# Altium PCB USB_ISO_FS_00.PcbDoc
Units mm, origin at the board's own origin, x right, y up, seen from the top; angles counter-clockwise.
Board outline 44 x 44 mm, 2 copper layers (Top Layer, Bottom Layer), stack 1.571 mm thick; 27 components, 22 nets, 93 pads, 16 vias.
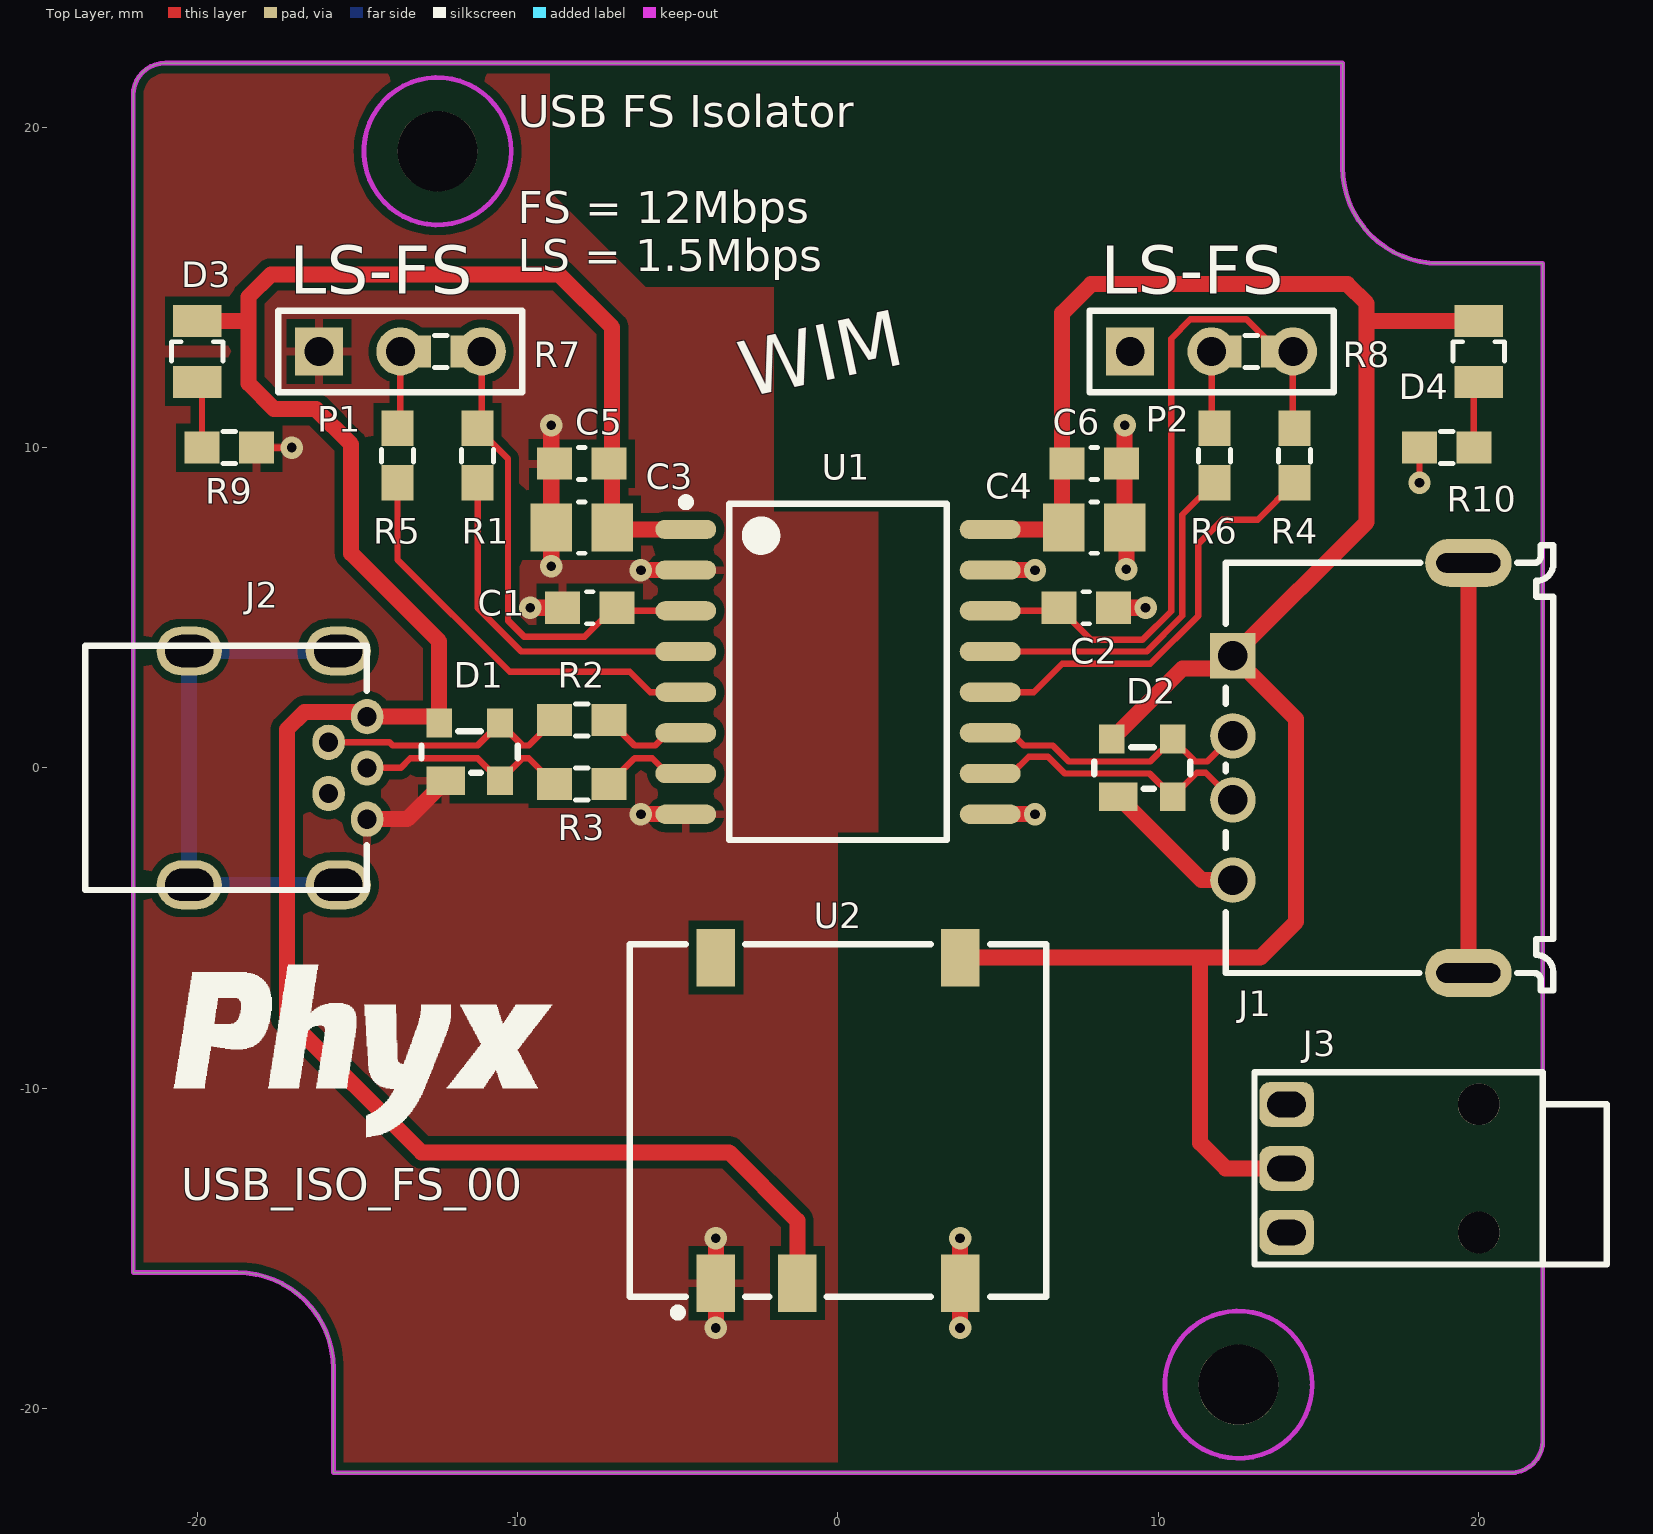
[diagram p0: Top Layer view]
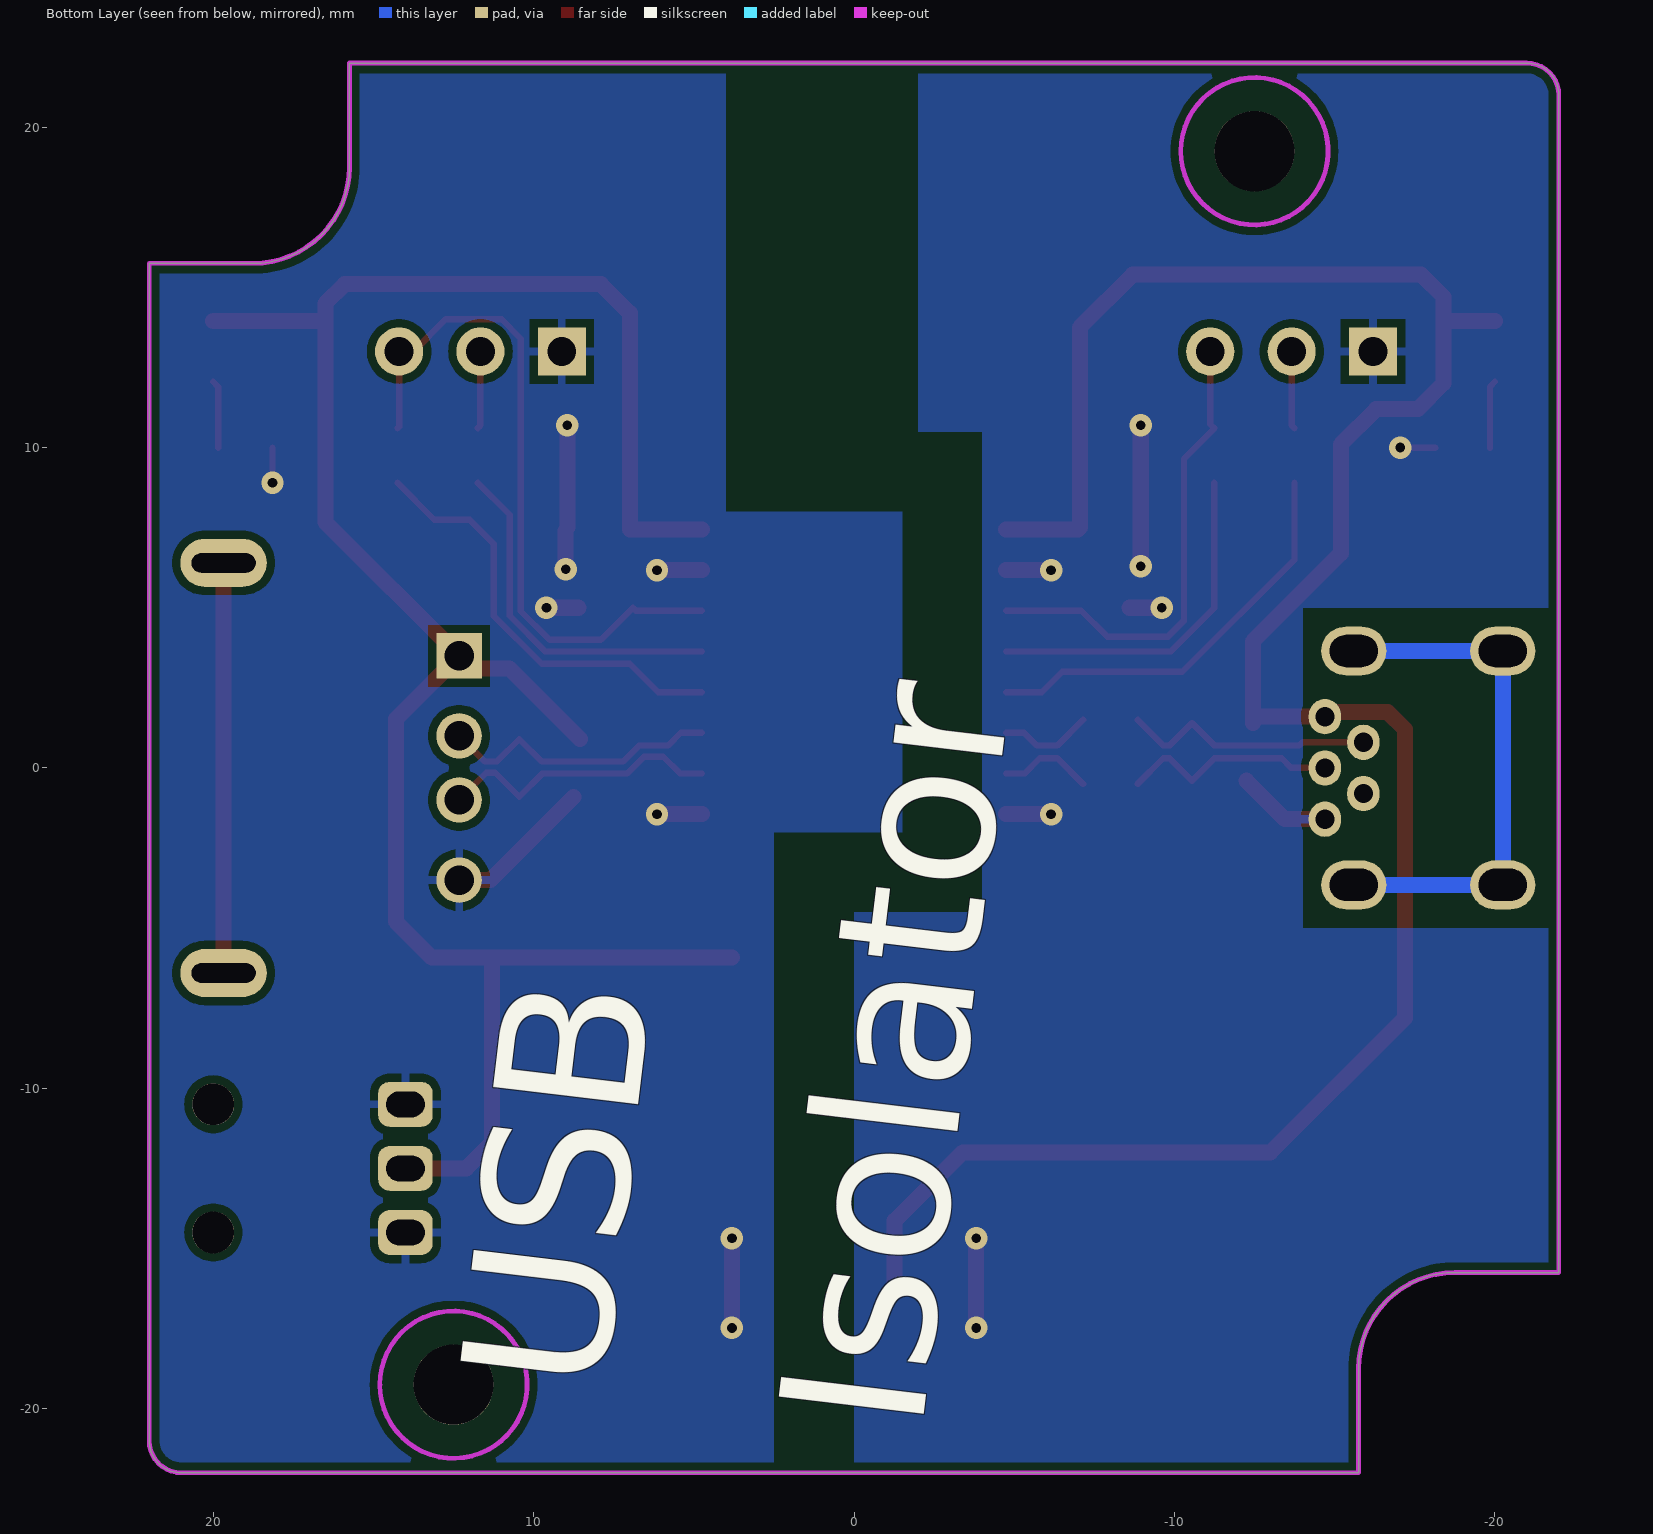
[diagram p1: Bottom Layer view, seen from below]
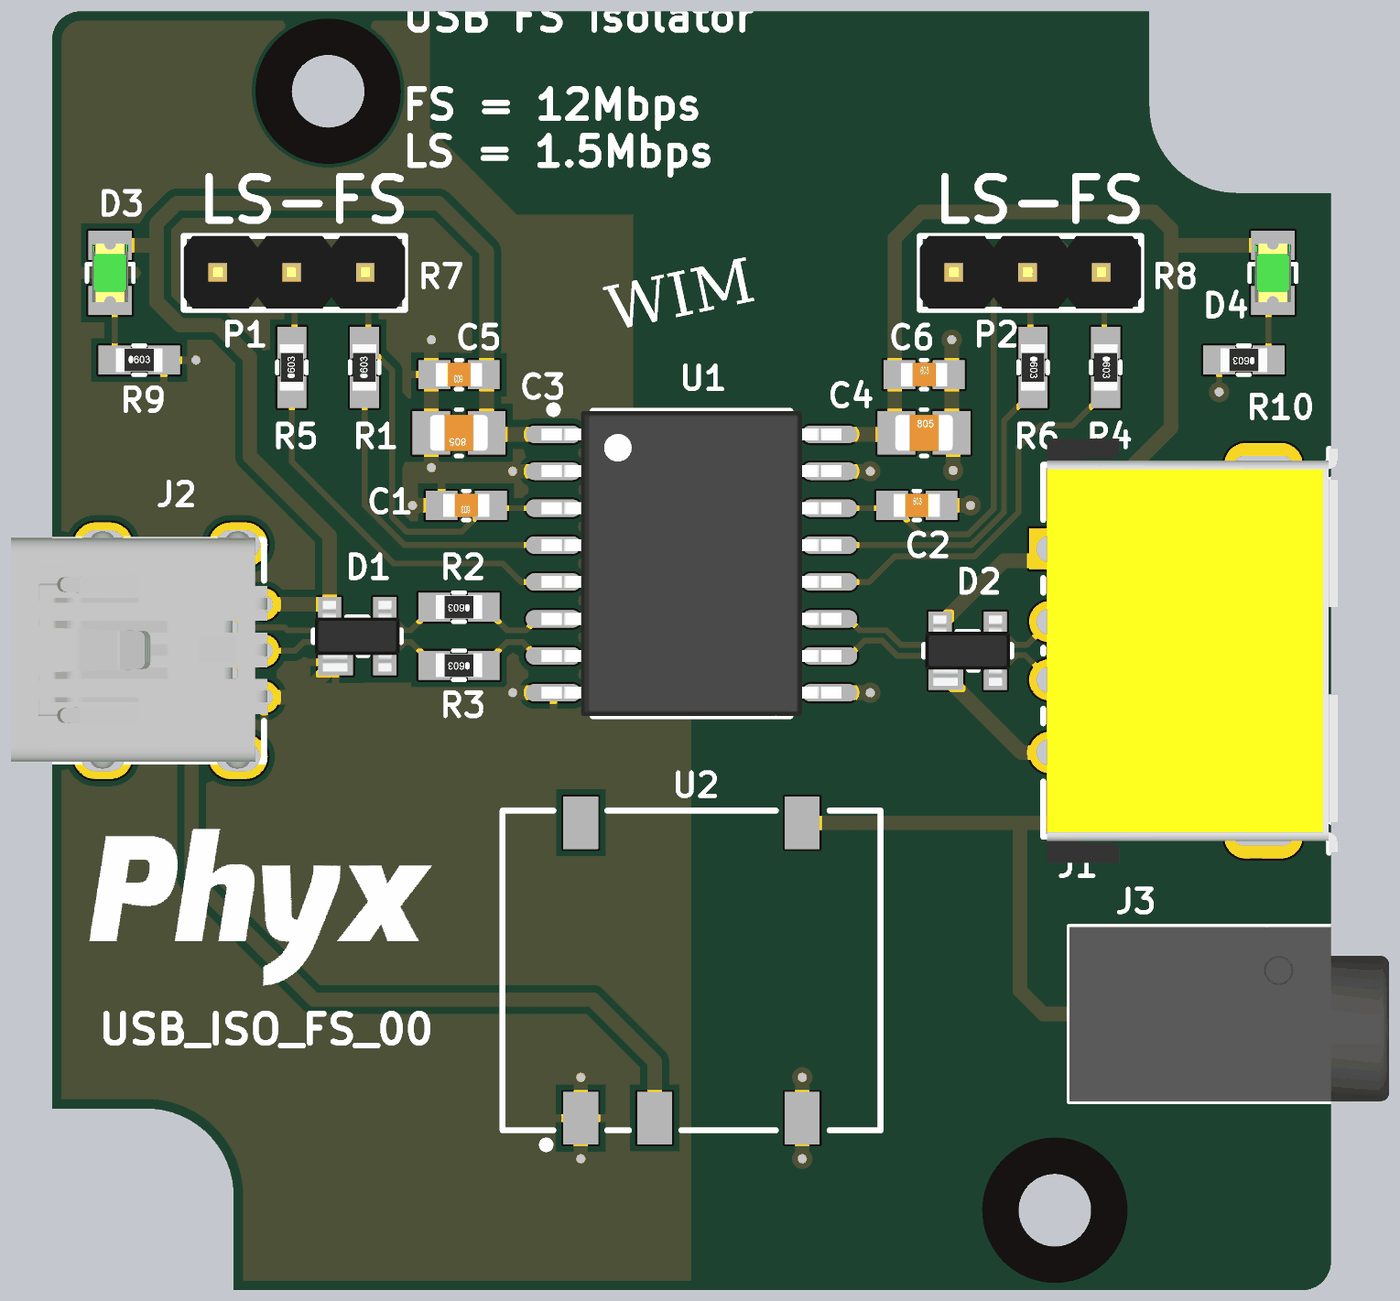
[diagram p2: 3D render of the assembled board from above, using the file's embedded part models]

## Layer stack, top to bottom
Top Solder: solder mask 0.0102, Solder Resist, Dk 3.5
Top Layer: signal copper 0.0356
Dielectric1: dielectric 1.5, FR-4, Dk 4.8
Bottom Layer: signal copper 0.0356
Bottom Solder: solder mask 0.0102, Solder Resist, Dk 3.5

## Board outline
-22,-15.75 -18.75,-15.75 cw(c-18.75,-18.75) -15.75,-18.75 -15.75,-22 21,-22 ccw(c21,-21) 22,-21 22,15.75 18.75,15.75 cw(c18.75,18.75) 15.75,18.75 15.75,22 -21,22 ccw(c-21,21) -22,21

## Design rules (kind name [scope] priority, off if disabled: settings)
Clearance [All] p1: gap=0.15 except(0.25: Arc-Poly Track-Poly SMDPad-Poly THPad-Poly Via-Poly Fill-Poly Poly-Poly)
HoleSize [All] p1: absolutevalues=TRUE maxlimit=4 minlimit=0.025 maxpercent=80.000 minpercent=20.000
MinimumSolderMaskSliver [All] p1: minsoldermaskwidth=0.1
PolygonConnect PolygonConnect_Via [IsVia] p1: connectstyle=Direct reliefconductorwidth=0.254 reliefentries=4 polygonreliefangle="90 Angle" airgapwidth=0.254
PolygonConnect [All] p2: connectstyle=Relief reliefconductorwidth=0.254 reliefentries=4 polygonreliefangle="90 Angle" airgapwidth=0.254
RoutingVias [All] p1: holewidth=0.3 width=0.7 viastyle="Through Hole" minholewidth=0.3 minwidth=0.7 maxholewidth=0.3 maxwidth=0.7
SilkToSolderMaskClearance SilkscreenOverComponentPads [IsPad] p1: minsilkscreentomaskgap=0.254 clearancetoexposedcopper=TRUE
SolderMaskExpansion [All] p1: expansion=0.075
Width [All] p1: maxlimit=2 minlimit=0.2 preferedwidth=0.5 minimp=50.000000 maximp=50.000000 favimp=50.000000
27 further rules are at their usual default settings.

## Classes and differential pairs
net class POWER: GND GND_ISO VDD1 VDD2 VUSB VUSB_ISO
net class 90r: USB.D_N USB.D_P

## Components (designator, comment, footprint, x,y, rotation, side; value= is the part's Value field where it differs from the comment)
C1 "CAP_CERAMIC" C0603_N -7.75,5 r180 top
C2 "CAP_CERAMIC" C0603_N 7.75,5 r0 top
C3 "CAP_CERAMIC" C0805_N -8,7.5 r180 top
C4 "CAP_CERAMIC" C0805_N 8,7.5 r0 top
C5 "CAP_CERAMIC" C0603_N -8,9.5 r180 top
C6 "CAP_CERAMIC" C0603_N 8,9.5 r0 top
D1 "Low Capacitanse TVS Diode array" SOT-143 -11.5,0.5 r0 top
D2 "Low Capacitanse TVS Diode array" SOT-143 9.5,0 r0 top
D3 "Default 0805 Green LED" LED_0805_GR -20,13 r270 top
D4 "Default 0805 Green LED" LED_0805_GR 20,13 r270 top
J1 "USB type A Short horizontal connector" WE_614104150121 16,0 r90 top
J2 "THT USB Mini-B Receptacle" USB_Mini-B_THT -17.5,0 r90 top
J3 "Socket RA 3.5 with 1.35 barrel" DC-003 14,-12.5 r180 top
P1 "Header 3" HDR1X3 -16.2,13 r0 top
P2 "Header 3" HDR1X3 9.12,13 r0 top
R1 "RESISTOR" R0603_N -11.25,9.75 r90 top
R2 "RESISTOR" R0603_N -8,1.5 r180 top
R3 "RESISTOR" R0603_N -8,-0.5 r180 top
R4 "RESISTOR" R0603_N 14.25,9.75 r270 top
R5 "RESISTOR" R0603_N -13.75,9.75 r90 top
R6 "RESISTOR" R0603_N 11.75,9.75 r270 top
R7 "RESISTOR" R0603_N -12.4,13 r180 top
R8 "RESISTOR" R0603_N 12.9,13 r180 top
R9 "RESISTOR" R0603_N -19,10 r0 top
R10 "RESISTOR" R0603_N 19,10 r180 top
U1 "USB FS 12Mbps isolator 2,5kV" SOIC_W_16 0,3 r0 top
U2 "Isolated DC-DC module 1kV 5V 1W" R1SE-0505-R 0,-11 r90 top

## Footprints (in the part's own frame and the unit in brackets; to place one, negate y for a bottom-side part, rotate by r counter-clockwise, add the part's x,y. Pads: shape width x height; smd on the part's side, far side on the other; paste and mask are expansions set on the pad)
C0603_N [mm] "Low density"
  rect 1.1x1 smd: 1(-0.85,0) 2(0.85,0)
  silkscreen extent -0.1,-0.5 0.1,0.5, body extent -0.8,-0.4 0.8,0.4, height 0.3
C0805_N [mm] "Low density"
  rect 1.3x1.5 smd: 1(-0.95,0) 2(0.95,0)
  silkscreen extent -0.1,-0.8 0.1,0.8, body extent -1,-0.62 1,0.63, height 0.78
DC-003 [mm] "CUI PJ-040CH"
  rrect50% 1.7x1.4 hole 0.8 slot 1.2 at 0 deg paste-5: 1(0,0) 2(0,-2) 3(0,2)
  round 1.3 hole 1.3 unplated paste-5: MH1(-6,-2) MH2(-6,2)
  silkscreen extent -10,-3 1,3, body extent -10,-3 1,3, height 5
HDR1X3 [mm] "Connector; Header; 3 Position"
  rect 1.5x1.5 hole 0.9: 1(0,0)
  round 1.5 hole 0.9: 2(2.54,0) 3(5.08,0)
  silkscreen extent -1.27,-1.27 6.35,1.27, body extent -1.27,-1.23 6.35,1.27, height 8.2
LED_0805_GR [mm] "0805 LED GREEN"
  rect 1x1.5 smd: 1(-0.95,0) 2(0.95,0)
  silkscreen extent -0.3,-0.8 0.3,0.8, body extent -1.01,-0.62 1.01,0.63, height 1.1
R1SE-0505-R [mm] "R1SE-0505-R"
  rect 1.8x1.2 smd: 1(-5.08,3.81) 2(-5.08,1.27) 4(-5.08,-3.81) 5(5.08,-3.81) 8(5.08,3.81)
  silkscreen extent -6.12,-6.5 5.5,6.5, body extent -5.35,-6.37 5.35,6.38, height 7
R0603_N [mm] "Low density"
  rect 1.1x1 smd: 1(-0.85,0) 2(0.85,0)
  silkscreen extent -0.2,-0.5 0.2,0.5, body extent -0.8,-0.41 0.8,0.41, height 0.45
SOIC_W_16 [mm] "SOIC, 16-Leads, Body 10,30x7,50mm, Pitch 1,27mm, IPC Medium Density"
  oval 1.9x0.6 smd: 1(-4.75,4.445) 2(-4.75,3.175) 3(-4.75,1.905) 4(-4.75,0.635) 5(-4.75,-0.635) 6(-4.75,-1.905) 7(-4.75,-3.175) 8(-4.75,-4.445) 9(4.75,-4.445) 10(4.75,-3.175) 11(4.75,-1.905) 12(4.75,-0.635) 13(4.75,0.635) 14(4.75,1.905) 15(4.75,3.175) 16(4.75,4.445)
  silkscreen extent -4.87,-5.25 3.4,5.42, body extent -5.16,-5.25 5.16,5.25, height 2.65
SOT-143 [mm] "SOT-143"
  rect 1.2x0.9 smd: 1(-0.75,-0.9)
  rect 0.8x0.9 smd: 2(0.95,-0.9) 3(0.95,0.9) 4(-0.95,0.9)
  silkscreen extent -1.5,-0.65 1.5,0.65, body extent -1.46,-1.21 1.46,1.21, height 1
USB_Mini-B_THT [mm] "USB MiniB THT"
  oval 1.1x1.016 hole 0.6: 1(1.6,-2.8) 2(0.8,-1.6) 3(0,-2.8) 4(-0.8,-1.6) 5(-1.6,-2.8)
  oval 1.524x2.032 hole 1 slot 1.5 at 90 deg: MH1(-3.65,2.75) MH2(3.65,2.75) MH3(-3.65,-1.9) MH4(3.65,-1.9)
  silkscreen extent -3.81,-2.79 3.81,6, body extent -4.05,-2.91 4.1,5.91, height 3.95
WE_614104150121 [mm] "Wurth SHORT USB conn 614104150121"
  rect 1.42x1.42 hole 0.92: 1(3.5,3.675)
  round 1.42 hole 0.92: 2(1,3.675) 3(-1,3.675) 4(-3.5,3.675)
  oval 1.5x2.7 hole 0.6 slot 2 at 90 deg: MH1(-6.4,-3.675) MH2(6.4,-3.675)
  silkscreen extent -6.95,-6.33 6.95,3.9, body extent -7.3,-6.22 7.3,3.78, height 7.22

## Part data
C1 C2 C5 C6: library part "CAP # 100nF 16V 0603", "Capacitor Ceramic"
C3 C4: library part "CAP # 10uF 10V 0805", "Capacitor Ceramic"
D1 D2: library part "TVS # YSSR05", "=Description"
D3 D4: library part "LED # Green 0805", "=Description"
J1: library part "USB A 614104150121 Short"
J2: library part "USB Mini-B F"
J3: library part "SCKT 1.35mm barrel 3.5mm dia", "=Description"
P1 P2: library part "Pin Header 2.54mm 3way"
R1 R4 R5 R6: library part "RES # 10K 0603"
R2 R3: library part "RES # 22R 0603"
R7 R8: library part "RES # 0R 0603"
R9 R10: library part "RES # 220R 0603"
U1: library part "ISO # USB ADuM3160BRWZ", "=Description"
U2: library part "ISO # PWR 5V 1W 1kV R1SE-0505-R", "=Description"

## Free pads (board coordinates)
  round 2.5 hole 2.5 unplated mask+1.25: 0(-12.5,19.25) 0(12.5,-19.25)

## Via types
v1: diameter 0.7, hole 0.3, Top Layer to Bottom Layer, tented top, 16 vias

## Nets (pads, with @x,y where several pads share a name; then routed paths per layer and width w, separated by ;. In a path a pad name is that pad's centre, name@x,y a point inside that pad or via, vN(x,y) a via of type N, cw(c..) or ccw(c..) an arc to the next point about the centre after c; other vN are vias at no path point)
CH: J2.MH1 J2.MH2 J2.MH3 J2.MH4 | length 16.6
  Bottom Layer w0.5: J2.MH3 J2.MH1 J2.MH2 J2.MH4
CH_ISO: J1.MH1 J1.MH2 | length 12.8
  Top Layer w0.5: J1.MH1 J1.MH2
GND: C1.2 C3.2 C5.2 D1.1 J2.5 P1.1 R9.2 U1.2 U1.8 U2.1 | length 15
  Top Layer w0.2: R9.2 v1(-17.05,10)
  Top Layer w0.5: J2.5 -13.45,-1.6 D1.1 ; v1@-9.6,5 C1.2 ; v1(-8.95,6.3) C3.2 v1(-8.95,10.7) ; v1(-6.15,-1.445) U1.8 ; v1(-6.15,6.175) U1.2 ; v1(-3.81,-17.48) U2.1 v1(-3.81,-14.68)
  other v1: -9.6,5
GND_ISO: C2.2 C4.2 C6.2 D2.1 J1.4 J3.2 J3.3 P2.1 R10.2 U1.9 U1.15 U2.4 | length 16.8
  Top Layer w0.2: v1(18.15,8.9) R10.2
  Top Layer w0.5: v1(3.81,-17.48) U2.4 v1(3.81,-14.68) ; U1.9 v1(6.15,-1.445) ; U1.15 v1(6.15,6.175) ; C2.2 v1(9.6,5) ; D2.1 11.35,-3.5 J1.4 ; C4.2 v1(8.95,10.7) ; v1(9,6.2) C4.2@9,7.4
NetD1_2: D1.2 J2.3 R3.2 | length 6.9
  Top Layer w0.2: J2.3 -13.65,0 -13.35,0.3 -11.25,0.3 D1.2 -9.85,0.3 -9.65,0.3 R3.2
NetD1_3: D1.3 J2.2 R2.2 | length 8
  Top Layer w0.2: J2.2 -14,0.8 -13.9,0.7 -11.25,0.7 D1.3 -9.85,0.7 -9.65,0.7 R2.2
NetD3_2: D3.2 R9.1 | length 2.1
  Top Layer w0.2: D3.2 -19.85,11.9 R9.1
NetD4_2: D4.2 R10.1 | length 2.1
  Top Layer w0.2: R10.1 19.85,11.9 D4.2
NetP1_2: P1.2 R5.2 R7.2 | length 2.4
  Top Layer w0.2: R5.2 -13.66,10.69 P1.2
NetP2_2: P2.2 R6.1 R8.2 | length 2.4
  Top Layer w0.2: P2.2 11.66,10.69 R6.1
PDEN: R1.1 U1.4 | length 11
  Top Layer w0.2: R1.1 -11.25,5 -9.885,3.635 U1.4
PIN: R4.2 U1.12 | length 13.5
  Top Layer w0.2: U1.12 6.115,2.365 7,3.25 9.75,3.25 11.25,4.75 11.25,7 12,7.75 13.1,7.75 R4.2
SDPU: R5.1 U1.5 | length 13.1
  Top Layer w0.2: R5.1 -13.75,6.5 -10.25,3 -6.5,3 -5.865,2.365 U1.5
SPD: R6.2 U1.13 | length 11
  Top Layer w0.2: U1.13 9.635,3.635 10.75,4.75 10.75,7.9 R6.2
USB.D_N: R2.1 U1.6 | length 2.9
  Top Layer w0.2: R2.1 -6.35,0.7 -5.7,0.7 -5.305,1.095 U1.6
USB.D_P: R3.1 U1.7 | length 2.9
  Top Layer w0.2: R3.1 -6.35,0.3 -5.8,0.3 -5.325,-0.175 U1.7
USB_ISO.D_N: D2.3 J1.2 U1.11 | length 8.9
  Top Layer w0.2: U1.11 5.405,1.095 5.8,0.7 6.7,0.7 7.2,0.2 9.75,0.2 D2.3 11.15,0.2 11.525,0.2 J1.2
USB_ISO.D_P: D2.2 J1.3 U1.10 | length 9
  Top Layer w0.2: U1.10 5.425,-0.175 5.95,0.35 6.555,0.35 7.08,-0.175 9.725,-0.175 D2.2 11.2,-0.15 11.475,-0.15 J1.3
VDD1: C1.1 P1.3 R1.2 R7.1 U1.3 | length 14.9
  Top Layer w0.2: P1.3 -11.12,10.73 R1.2 -10.3,9.65 -10.3,4.6 -9.8,4.1 -7.9,4.1 -7.095,4.905 U1.3
VDD2: C2.1 P2.3 R4.1 R8.1 U1.14 | length 21.9
  Top Layer w0.2: U1.14 6.805,4.905 C2.1 7.9,4 9.505,4 10.4,4.895 10.4,13.4 11,14 12.75,14 R8.1 P2.3 14.2,10.65 R4.1
VUSB: C3.1 C5.1 D1.4 D3.1 J2.1 U1.1 U2.2 | length 73.6
  Top Layer w0.5: D3.1 -18.45,13.95 -18.4,14 ; D1.4 D1.4@-12.45,1.7 ; C3.1 -7.05,13.75 -8.7,15.4 -17.7,15.4 -18.4,14.7 -18.4,14 ; C3.1@-6.995,7.445 U1.1 ; U2.2 -1.27,-14.13 -3.4,-12 -13,-12 -17.2,-7.8 -17.2,1.2 -16.65,1.75 -14.7,1.75 J2.1 -12.55,1.6 D1.4@-12.45,1.7 ; -18.4,14 -18.4,12 -17.6,11.2 -16.3,11.2 -15.2,10.1 -15.2,6.7 -12.45,3.95 D1.4@-12.45,1.7
VUSB_ISO: C4.1 C6.1 D2.4 D4.1 J1.1 J3.1 U1.16 U2.5 | length 69.1
  Top Layer w0.5: U2.5 11.3,-5.92 ; U1.16 6.995,7.445 6.995,14.195 7.9,15.1 15.9,15.1 16.5,14.5 16.5,13.9 ; D2.4 10.75,3.1 11.925,3.1 J1.1 ; J3.1 12.1,-12.5 11.3,-11.7 11.3,-5.92 ; D4.1 16.55,13.95 16.5,13.9 ; 11.3,-5.92 13.18,-5.92 14.3,-4.8 14.3,1.525 J1.1 ; J1.1 16.5,7.675 16.5,13.9
pads on no net: J2.4 J3.MH1 J3.MH2 U2.8

## Polygon pours and split planes (outlines as drawn)
GND on Top Layer "T_GND" (solid, remove dead copper, pour order 2): 1.25,8 1.25,-2 0,-2 0,-22 -22,-22 -22,22 -9,22 -9,18 -6,15 -2,15 -2,8
GND_ISO on Bottom Layer "B_GND_ISO" (solid, remove dead copper, pour order 4): 4,22 22,22 22,-22 2.5,-22 2.5,-2 -1.5,-2 -1.5,8 4,8
GND on Bottom Layer "B_GND" (solid, remove dead copper, pour order 6): -2,22 -2,10.5 -4,10.5 -4,-4.5 0,-4.5 0,-22 -22,-22 -22,-5 -14,-5 -14,5 -22,5 -22,22

## Keep-outs
Keep-Out Layer:
  circle w0.15: c12.5,-19.25 r2.3
  circle w0.15: c-12.5,19.25 r2.3
  lines w0.15: -22,-15.75 -22,21 cw(c-21,21) -21,22 15.75,22 15.75,18.75 ccw(c18.75,18.75) 18.75,15.75 22,15.75 22,-21 cw(c21,-21) 21,-22 -15.75,-22 -15.75,-18.75 ccw(c-18.75,-18.75) -18.75,-15.75 -22,-15.75
  text ".Layer_Name" at 283.5,-45 h3.5

## Other copper
Top Layer:
  text ".Layer_Name" at 283.5,-45 h3.5
Bottom Layer:
  text ".Layer_Name" at 283.5,-45 h3.5

## Silkscreen, mask and mechanical layers (free items; w line width, h text height)
Top Overlay:
  drawing of 4 lines, arcs and shapes, not listed
  text "USB FS Isolator" at -10,20 h1
  text "FS = 12Mbps / LS = 1.5Mbps" at -10,15.5 h1
  text "LS-FS" at -17.12,14.8 h1.5
  text "LS-FS" at 8.2,14.8 h1.5
  text "WIM" at -2.75,11 h3 r12
  text "USB_ISO_FS_00" at -20.5,-13.5 h1
  text ".Layer_Name" at 283.5,-45 h3.5
Bottom Overlay:
  text "USB  / Isolator" at -4,-21 h10 r276.79
  text ".Layer_Name" at 283.5,-45 h3.5
Top Paste:
  text ".Layer_Name" at 283.5,-45 h3.5
Bottom Paste:
  text ".Layer_Name" at 283.5,-45 h3.5
Top Solder:
  text ".Layer_Name" at 283.5,-45 h3.5
Bottom Solder:
  text ".Layer_Name" at 283.5,-45 h3.5
Drill Guide:
  text ".Layer_Name" at 283.5,-45 h3.5
3D Symbols:
  text ".Layer_Name" at 283.5,-45 h3.5
Outline:
  the board outline again, w0.15
Comments:
  text ".Layer_Name" at 283.5,-45 h3.5
Fabrication:
  text "All Dimensions are in mm" at -10,-38 h1
  text ".Layer_Name" at 283.5,-45 h3.5
Placebound Top:
  text ".Layer_Name" at 283.5,-45 h3.5
Placebound Bottom:
  text ".Layer_Name" at 283.5,-45 h3.5
Frame:
  drawing of 15 lines, arcs and shapes, not listed
  text "Document" at 279,-30 h2
  text ".PCB_TITLE" at 280.5,-35.5 h4
  text "Layer Name" at 279,-40 h2
  text "Date" at 279,-50 h2
  text "Rev" at 319,-50 h2
  text ".Print_Date" at 282,-55.5 h3.5
  text ".PCB_REV" at 323.5,-55.5 h4
  text "Desginer" at 229,-60 h2
  text "Document" at 279,-60 h2
  text ".Pcb_File_Name_No_Path" at 280.5,-65 h1.5
  text ".PCB_ENGINEER" at 233.5,-65.5 h4
Mechanical 11:
  circle w0.2: c12.5,-19.25 r1.25
  circle w0.2: c-12.5,19.25 r1.25
  lines w0.15: -24.5,0 -22,0 ; -22.5,-0.25 ccw(c-22.5,0.354) -22.073,-0.073 -22,0 ; -22.5,0.25 cw(c-22.5,-0.354) -22.073,0.073 -22,0 ; 22.5,-0.25 cw(c22.5,0.354) 22.073,-0.073 22,0 ; 22.5,0.25 ccw(c22.5,-0.354) 22.073,0.073 22,0 ; 24.5,0 22,0 ; -22,-15.75 -22,21 cw(c-21,21) -21,22 15.75,22 15.75,18.75 ccw(c18.75,18.75) 18.75,15.75 22,15.75 22,-21 cw(c21,-21) 21,-22 -15.75,-22 -15.75,-18.75 ccw(c-18.75,-18.75) -18.75,-15.75 -22,-15.75
  text "Micro USB" at -27,0.25 h0.5
  text "USB A" at 23,0.25 h0.5
Assembly Top:
  text ".Layer_Name" at 283.5,-45 h3.5
Assembly Bottom:
  text ".Layer_Name" at 283.5,-45 h3.5
Drill Drawing:
  text ".legend" at 42.5,-9.25 h2

## Dimensions
-22,-15.75 to 22,-21 on Fabrication
-15.75,-22 to -21,22 on Fabrication
12.5,-19.25 to -15.75,-22 on Drill Drawing
-22,-15.75 to 12.5,-19.25 on Drill Drawing

## Text inside footprints (layer, text, board x,y; h text height)
J2: Comments "PCB Edge" at -22.7,-2.5 h0.7 r90